# EAGLE board vocore-v1.0 (EAGLE 7.2.0), part 1 of 2
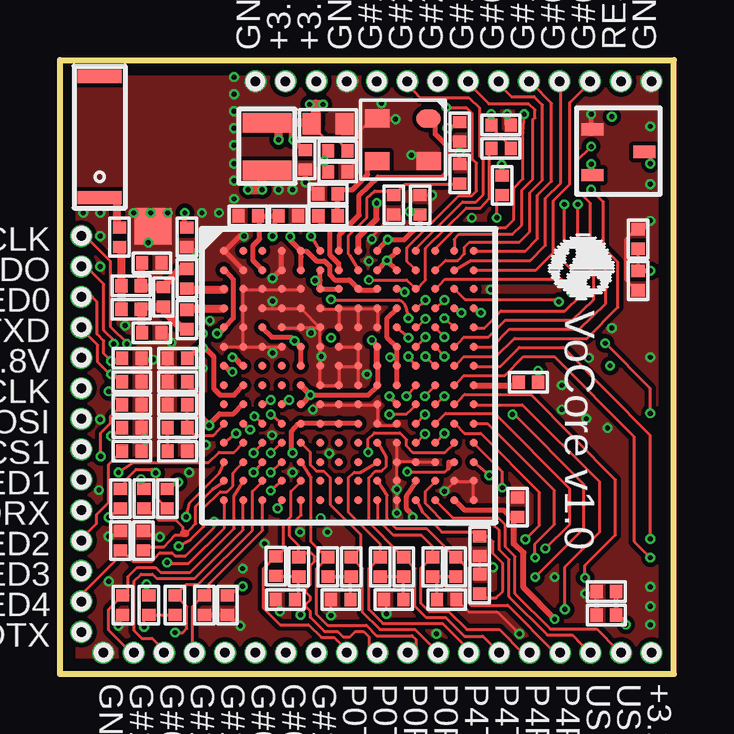
[diagram p0: board, top side]
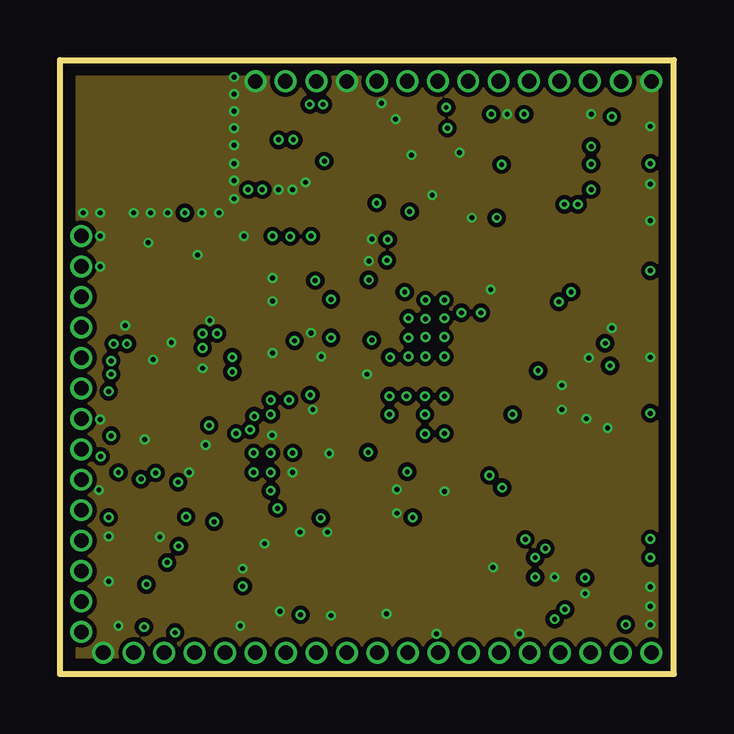
[diagram p1: board, inner layer Route2]
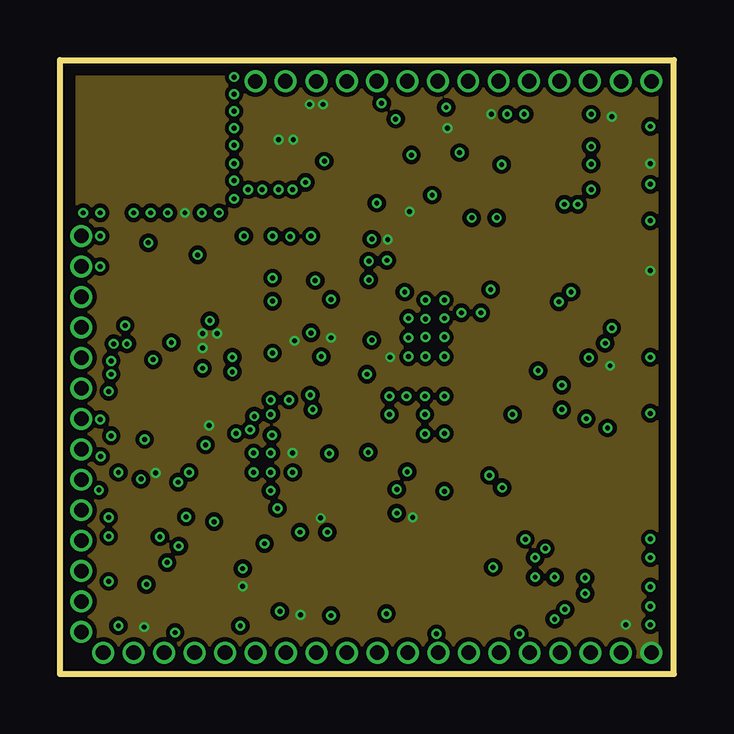
[diagram p2: board, inner layer Route3]
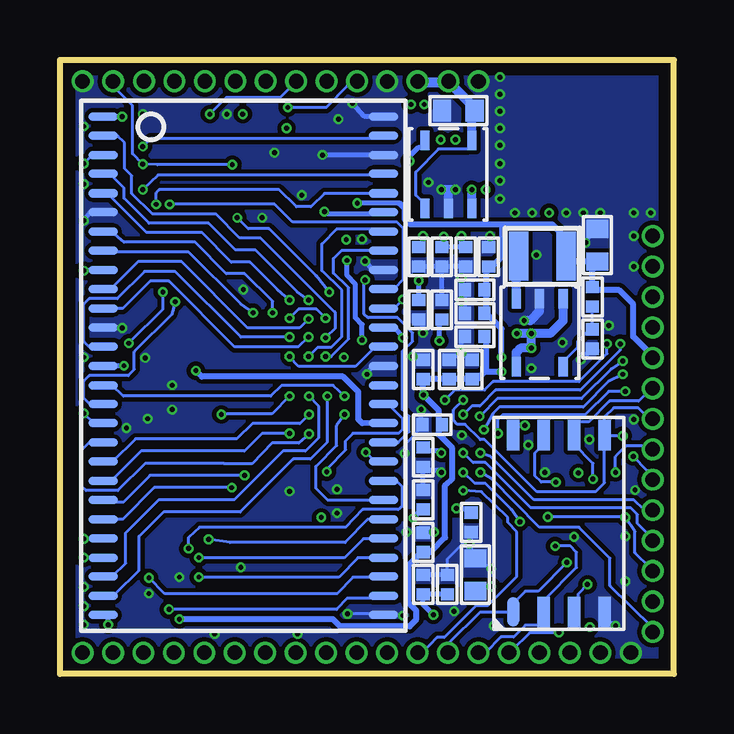
[diagram p3: board, bottom side, seen from below]

Size 25.6 x 25.6 mm. Coordinates in mm from the lower left corner, seen from the top.
Outline: 0,0 25.6,0 25.6,25.6 0,25.6 0,0
Copper layers ((1*2)*(3*16)): Top 0.0356mm / dielectric 1.5011mm / Route2 0.0356mm / dielectric 0.1499mm / Route3 0.0356mm / dielectric 0.2007mm / Bottom 0.0356mm
Design rules "SilverCircuits4layer *": minimum track width 7mil, minimum drill 14mil, track to track 7mil, track to pad 7mil, pad to pad 7mil, via to via 7mil, smd to smd 0mil, copper to edge 20mil, drill to drill 8mil, minimum pad ring 0mil, minimum via ring 2mil, stop-mask expansion 4mil, vias tented up to drill 0mil, thermal gap 10mil

## Footprints (pad centres in the part's own frame; a part is rotated, then mirrored left to right if it is on the bottom)
0402_1PRIMARY = smd 0.559 x 0.508: 1 0,0.406; 2 0,-0.406
0603_1PRIMARY = smd 0.762 x 0.914: 1 -0.686,0; 2 0.686,0
5020_1PRIMARY = smd 0.559 x 1.829: 1 -0.94,0.584; 2 4.115,0.584
0806_1PRIMARY = smd 0.813 x 2.032: 1 -0.991,-0.051; 2 0.991,-0.051
PORT_1PIN_DECAL_1PRIMARY = drill 0.61 pad 0.914: 1 -0.076,-1.27
TEST_POINT_GND_1PRIMARY = smd 1.524 x 1.524: 1 -0.076,-1.27
TFBGA196_1PRIMARY = smd 0.33 x 0.33: 1 -5.207,5.207; 2 -4.394,5.207; 3 -3.607,5.207; 4 -2.794,5.207; 5 -2.007,5.207; 6 -1.194,5.207; 7 -0.406,5.207; 8 0.406,5.207; 9 1.194,5.207; 10 2.007,5.207; 11 2.794,5.207; 12 3.607,5.207; 13 4.394,5.207; 14 5.207,5.207; 15 -5.207,4.394; 16 -4.394,4.394; 17 -3.607,4.394; 18 -2.794,4.394; 19 -2.007,4.394; 20 -1.194,4.394; 21 -0.406,4.394; 22 0.406,4.394; 23 1.194,4.394; 24 2.007,4.394; 25 2.794,4.394; 26 3.607,4.394; 27 4.394,4.394; 28 5.207,4.394; 29 -5.207,3.607; 30 -4.394,3.607; 31 -3.607,3.607; 32 -2.794,3.607; 33 -2.007,3.607; 34 -1.194,3.607; 35 -0.406,3.607; 36 0.406,3.607; 37 1.194,3.607; 38 2.007,3.607; 39 2.794,3.607; 40 3.607,3.607; 41 4.394,3.607; 42 5.207,3.607; 43 -5.207,2.794; 44 -4.394,2.794; 45 -3.607,2.794; 46 -2.794,2.794; 47 -2.007,2.794; 48 -1.194,2.794; 49 -0.406,2.794; 50 0.406,2.794; 51 1.194,2.794; 52 2.007,2.794; 53 2.794,2.794; 54 3.607,2.794; 55 4.394,2.794; 56 5.207,2.794; 57 -5.207,2.007; 58 -4.394,2.007; 59 -3.607,2.007; 60 -2.794,2.007; 61 -2.007,2.007; 62 -1.194,2.007; 63 -0.406,2.007; 64 0.406,2.007; 65 1.194,2.007; 66 2.007,2.007; 67 2.794,2.007; 68 3.607,2.007; 69 4.394,2.007; 70 5.207,2.007; 71 -5.207,1.194; 72 -4.394,1.194; 73 -3.607,1.194; 74 -2.794,1.194; 75 -2.007,1.194; 76 -1.194,1.194; 77 -0.406,1.194; 78 0.406,1.194; 79 1.194,1.194; 80 2.007,1.194; 81 2.794,1.194; 82 3.607,1.194; 83 4.394,1.194; 84 5.207,1.194; 85 -5.207,0.406; 86 -4.394,0.406; 87 -3.607,0.406; 88 -2.794,0.406; 89 -2.007,0.406; 90 -1.194,0.406; 91 -0.406,0.406; 92 0.406,0.406; 93 1.194,0.406; 94 2.007,0.406; 95 2.794,0.406; 96 3.607,0.406; 97 4.394,0.406; 98 5.207,0.406; 99 -5.207,-0.406; 100 -4.394,-0.406; 101 -3.607,-0.406; 102 -2.794,-0.406; 103 -2.007,-0.406; 104 -1.194,-0.406; 105 -0.406,-0.406; 106 0.406,-0.406; 107 1.194,-0.406; 108 2.007,-0.406; 109 2.794,-0.406; 110 3.607,-0.406; 111 4.394,-0.406; 112 5.207,-0.406; 113 -5.207,-1.194; 114 -4.394,-1.194; 115 -3.607,-1.194; 116 -2.794,-1.194; 117 -2.007,-1.194; 118 -1.194,-1.194; 119 -0.406,-1.194; 120 0.406,-1.194; 121 1.194,-1.194; 122 2.007,-1.194; 123 2.794,-1.194; 124 3.607,-1.194; 125 4.394,-1.194; 126 5.207,-1.194; 127 -5.207,-2.007; 128 -4.394,-2.007; 129 -3.607,-2.007; 130 -2.794,-2.007; 131 -2.007,-2.007; 132 -1.194,-2.007; 133 -0.406,-2.007; 134 0.406,-2.007; 135 1.194,-2.007; 136 2.007,-2.007; 137 2.794,-2.007; 138 3.607,-2.007; 139 4.394,-2.007; 140 5.207,-2.007; 141 -5.207,-2.794; 142 -4.394,-2.794; 143 -3.607,-2.794; 144 -2.794,-2.794; 145 -2.007,-2.794; 146 -1.194,-2.794; 147 -0.406,-2.794; 148 0.406,-2.794; 149 1.194,-2.794; 150 2.007,-2.794; 151 2.794,-2.794; 152 3.607,-2.794; 153 4.394,-2.794; 154 5.207,-2.794; 155 -5.207,-3.607; 156 -4.394,-3.607; 157 -3.607,-3.607; 158 -2.794,-3.607; 159 -2.007,-3.607; 160 -1.194,-3.607; 161 -0.406,-3.607; 162 0.406,-3.607; 163 1.194,-3.607; 164 2.007,-3.607; 165 2.794,-3.607; 166 3.607,-3.607; 167 4.394,-3.607; 168 5.207,-3.607; 169 -5.207,-4.394; 170 -4.394,-4.394; 171 -3.607,-4.394; 172 -2.794,-4.394; 173 -2.007,-4.394; 174 -1.194,-4.394; 175 -0.406,-4.394; 176 0.406,-4.394; 177 1.194,-4.394; 178 2.007,-4.394; 179 2.794,-4.394; 180 3.607,-4.394; 181 4.394,-4.394; 182 5.207,-4.394; 183 -5.207,-5.207; 184 -4.394,-5.207; 185 -3.607,-5.207; 186 -2.794,-5.207; 187 -2.007,-5.207; 188 -1.194,-5.207; 189 -0.406,-5.207; 190 0.406,-5.207; 191 1.194,-5.207; 192 2.007,-5.207; 193 2.794,-5.207; 194 3.607,-5.207; 195 4.394,-5.207; 196 5.207,-5.207
SO8_1PRIMARY = smd 1.245 x 0.508: 1 -3.683,1.905 | smd 1.27 x 0.508: 2 -3.683,0.635; 3 -3.683,-0.635; 4 -3.683,-1.905; 5 3.683,-1.905; 6 3.683,-0.635; 7 3.683,0.635; 8 3.683,1.905
LDO1_1PRIMARY = smd 0.381 x 0.813: 1 -1.956,-2.845; 2 -0.965,-2.845; 3 0,-2.845; 4 0,0; 5 -1.956,0
U4_1PRIMARY = smd 0.914 x 0.508: 1 0,0; 2 0,-1.905; 3 -2.159,-0.965
Y1_1PRIMARY = smd 0.762 x 1.016: 1 0,-0.203; 2 0,1.93; 3 -1.778,1.93; 4 -1.778,-0.203
TSOP2-54P-400MIL_1PRIMARY = smd 1.219 x 0.356: 1 -5.842,10.389; 2 -5.842,9.601; 3 -5.842,8.788; 4 -5.842,8.001; 5 -5.842,7.188; 6 -5.842,6.401; 7 -5.842,5.588; 8 -5.842,4.801; 9 -5.842,3.988; 10 -5.842,3.2; 11 -5.842,2.388; 12 -5.842,1.6; 13 -5.842,0.813; 14 -5.842,0; 15 -5.842,-0.813; 16 -5.842,-1.6; 17 -5.842,-2.388; 18 -5.842,-3.2; 19 -5.842,-3.988; 20 -5.842,-4.801; 21 -5.842,-5.588; 22 -5.842,-6.401; 23 -5.842,-7.188; 24 -5.842,-8.001; 25 -5.842,-8.788; 26 -5.842,-9.601; 27 -5.842,-10.389; 28 5.842,-10.389; 29 5.842,-9.601; 30 5.842,-8.788; 31 5.842,-8.001; 32 5.842,-7.188; 33 5.842,-6.401; 34 5.842,-5.588; 35 5.842,-4.801; 36 5.842,-3.988; 37 5.842,-3.2; 38 5.842,-2.388; 39 5.842,-1.6; 40 5.842,-0.813; 41 5.842,0; 42 5.842,0.813; 43 5.842,1.6; 44 5.842,2.388; 45 5.842,3.2; 46 5.842,3.988; 47 5.842,4.801; 48 5.842,5.588; 49 5.842,6.401; 50 5.842,7.188; 51 5.842,8.001; 52 5.842,8.788; 53 5.842,9.601; 54 5.842,10.389

## Placement (x,y rotation side)
C2  0402  [0402_1PRIMARY]  7.72,17.4 180 bottom
C4  0402  [0402_1PRIMARY]  7.85,19.1 270 top
C6  0402  [0402_1PRIMARY]  8.69,17.4 0 bottom
C7  0402  [0402_1PRIMARY]  9.53,19.1 90 top
C8  0402  [0402_1PRIMARY]  9.68,17.4 0 bottom
C9  0402  [0402_1PRIMARY]  18.39,22.89 90 top
C10  0402  [0402_1PRIMARY]  13.92,19.56 180 top
C14  0402  [0402_1PRIMARY]  10.64,15.19 180 bottom
C15  0402  [0402_1PRIMARY]  11.18,20.02 90 top
C16  0402  [0402_1PRIMARY]  10.46,12.7 180 bottom
C17  0402  [0402_1PRIMARY]  15.01,19.56 180 top
C18  0402  [0402_1PRIMARY]  10.64,17.4 180 bottom
C35  0402  [0402_1PRIMARY]  5.28,16.48 180 top
C36  0402  [0402_1PRIMARY]  2.97,16.18 270 top
C37  0402  [0402_1PRIMARY]  4.32,15.72 0 top
C38  0402  [0402_1PRIMARY]  5.28,14.78 0 top
C40  0402  [0402_1PRIMARY]  3.84,14.22 90 top
C42  0402  [0402_1PRIMARY]  9.68,15.19 180 bottom
C43  0402  [0402_1PRIMARY]  17.5,5.33 0 top
C48  0402  [0402_1PRIMARY]  11.71,3.1 270 top
C50  0402  [0402_1PRIMARY]  9.4,3.1 270 top
C77  0402  [0402_1PRIMARY]  13.92,3.1 270 top
C79  0402  [0402_1PRIMARY]  16.13,3.1 90 top
C84  0402  [0402_1PRIMARY]  16.66,22.61 0 top
C92  0402  [0402_1PRIMARY]  10.46,7.26 180 bottom
C93  0402  [0402_1PRIMARY]  8.41,12.7 180 bottom
C98  0402  [0402_1PRIMARY]  9.37,12.7 180 bottom
C103  0603  [0603_1PRIMARY]  8.99,23.5 180 bottom
C104  0402  [0402_1PRIMARY]  8.31,14.07 270 bottom
C105  0603  [0603_1PRIMARY]  8.28,4.14 270 bottom
C106  0603  [0603_1PRIMARY]  3.2,17.88 90 bottom
C107  0603  [0603_1PRIMARY]  11.18,22.94 0 top
C108  0402  [0402_1PRIMARY]  8.31,15.04 270 bottom
C109  0402  [0402_1PRIMARY]  10.46,5.49 180 bottom
C110  0402  [0402_1PRIMARY]  19.08,6.96 180 top
C111  0402  [0402_1PRIMARY]  10.08,10.39 270 bottom
C112  0402  [0402_1PRIMARY]  6.98,2.87 0 top
C113  0402  [0402_1PRIMARY]  4.9,13.16 270 top
C114  0402  [0402_1PRIMARY]  9.45,3.73 180 bottom
C161  0402  [0402_1PRIMARY]  8.31,16.03 270 bottom
C251  0402  [0402_1PRIMARY]  22.78,2.46 90 top
C279  0402  [0402_1PRIMARY]  2.49,18.21 180 top
C387  0402  [0402_1PRIMARY]  10.24,21.44 0 top
C388  0402  [0402_1PRIMARY]  22.78,3.43 270 top
C389  0402  [0402_1PRIMARY]  24.1,18.14 180 top
C390  0402  [0402_1PRIMARY]  24.1,16.41 0 top
C391  0402  [0402_1PRIMARY]  10.46,3.73 180 bottom
C414  0402  [0402_1PRIMARY]  4.9,12.19 270 top
C422  0402  [0402_1PRIMARY]  10.46,9.04 0 bottom
C443  0402  [0402_1PRIMARY]  5.28,18.21 180 top
CON2  5020  [5020_1PRIMARY]  1.07,23.98 270 top
D1  0402  [0402_1PRIMARY]  4.9,9.3 90 top
L11  0402  [0402_1PRIMARY]  3.84,17.14 90 top
L12  0402  [0402_1PRIMARY]  2.97,15.21 270 top
L14  0806  [0806_1PRIMARY]  5.49,17.48 0 bottom
L15  0806  [0806_1PRIMARY]  8.59,22 90 top
PB00  PORT_1PIN_DECAL  [PORT_1PIN_DECAL_1PRIMARY]  1.88,2.16 0 top
PB01  PORT_1PIN_DECAL  [PORT_1PIN_DECAL_1PRIMARY]  3.15,2.16 0 top
PB02  PORT_1PIN_DECAL  [PORT_1PIN_DECAL_1PRIMARY]  4.42,2.16 0 top
PB03  PORT_1PIN_DECAL  [PORT_1PIN_DECAL_1PRIMARY]  6.96,2.16 0 top
PB04  PORT_1PIN_DECAL  [PORT_1PIN_DECAL_1PRIMARY]  5.69,2.16 0 top
PB05  PORT_1PIN_DECAL  [PORT_1PIN_DECAL_1PRIMARY]  8.23,2.16 0 top
PB06  PORT_1PIN_DECAL  [PORT_1PIN_DECAL_1PRIMARY]  9.5,2.16 0 top
PB07  PORT_1PIN_DECAL  [PORT_1PIN_DECAL_1PRIMARY]  10.77,2.16 0 top
PB08  PORT_1PIN_DECAL  [PORT_1PIN_DECAL_1PRIMARY]  12.04,2.16 0 top
PB09  PORT_1PIN_DECAL  [PORT_1PIN_DECAL_1PRIMARY]  13.31,2.16 0 top
PB10  PORT_1PIN_DECAL  [PORT_1PIN_DECAL_1PRIMARY]  14.58,2.16 0 top
PB11  PORT_1PIN_DECAL  [PORT_1PIN_DECAL_1PRIMARY]  15.85,2.16 0 top
PB12  PORT_1PIN_DECAL  [PORT_1PIN_DECAL_1PRIMARY]  17.12,2.16 0 top
PB13  PORT_1PIN_DECAL  [PORT_1PIN_DECAL_1PRIMARY]  18.39,2.16 0 top
PB14  PORT_1PIN_DECAL  [PORT_1PIN_DECAL_1PRIMARY]  19.66,2.16 0 top
PB15  PORT_1PIN_DECAL  [PORT_1PIN_DECAL_1PRIMARY]  20.93,2.16 0 top
PB16  PORT_1PIN_DECAL  [PORT_1PIN_DECAL_1PRIMARY]  22.2,2.16 0 top
PB17  PORT_1PIN_DECAL  [PORT_1PIN_DECAL_1PRIMARY]  23.47,2.16 0 top
PB18  PORT_1PIN_DECAL  [PORT_1PIN_DECAL_1PRIMARY]  24.74,2.16 0 top
PL01  PORT_1PIN_DECAL  [PORT_1PIN_DECAL_1PRIMARY]  0.97,19.53 0 top
PL02  PORT_1PIN_DECAL  [PORT_1PIN_DECAL_1PRIMARY]  0.97,18.26 0 top
PL03  PORT_1PIN_DECAL  [PORT_1PIN_DECAL_1PRIMARY]  0.97,16.99 0 top
PL04  PORT_1PIN_DECAL  [PORT_1PIN_DECAL_1PRIMARY]  0.97,15.72 0 top
PL05  PORT_1PIN_DECAL  [PORT_1PIN_DECAL_1PRIMARY]  0.97,14.45 0 top
PL06  PORT_1PIN_DECAL  [PORT_1PIN_DECAL_1PRIMARY]  0.97,13.18 0 top
PL07  PORT_1PIN_DECAL  [PORT_1PIN_DECAL_1PRIMARY]  0.97,11.91 0 top
PL08  PORT_1PIN_DECAL  [PORT_1PIN_DECAL_1PRIMARY]  0.97,10.64 0 top
PL09  PORT_1PIN_DECAL  [PORT_1PIN_DECAL_1PRIMARY]  0.97,9.37 0 top
PL10  PORT_1PIN_DECAL  [PORT_1PIN_DECAL_1PRIMARY]  0.97,8.1 0 top
PL11  PORT_1PIN_DECAL  [PORT_1PIN_DECAL_1PRIMARY]  0.97,6.83 0 top
PL12  PORT_1PIN_DECAL  [PORT_1PIN_DECAL_1PRIMARY]  0.97,5.56 0 top
PL13  PORT_1PIN_DECAL  [PORT_1PIN_DECAL_1PRIMARY]  0.97,4.29 0 top
PL14  PORT_1PIN_DECAL  [PORT_1PIN_DECAL_1PRIMARY]  0.97,3.02 0 top
PT01  PORT_1PIN_DECAL  [PORT_1PIN_DECAL_1PRIMARY]  8.23,25.98 0 top
PT02  PORT_1PIN_DECAL  [PORT_1PIN_DECAL_1PRIMARY]  10.77,25.98 0 top
PT03  PORT_1PIN_DECAL  [PORT_1PIN_DECAL_1PRIMARY]  9.5,25.98 359 top
PT04  PORT_1PIN_DECAL  [PORT_1PIN_DECAL_1PRIMARY]  12.04,25.98 0 top
PT05  PORT_1PIN_DECAL  [PORT_1PIN_DECAL_1PRIMARY]  13.31,25.98 359 top
PT06  PORT_1PIN_DECAL  [PORT_1PIN_DECAL_1PRIMARY]  14.58,25.98 359 top
PT07  PORT_1PIN_DECAL  [PORT_1PIN_DECAL_1PRIMARY]  15.85,25.98 359 top
PT08  PORT_1PIN_DECAL  [PORT_1PIN_DECAL_1PRIMARY]  17.12,25.98 359 top
PT09  PORT_1PIN_DECAL  [PORT_1PIN_DECAL_1PRIMARY]  18.39,25.98 359 top
PT10  PORT_1PIN_DECAL  [PORT_1PIN_DECAL_1PRIMARY]  19.66,25.98 359 top
PT11  PORT_1PIN_DECAL  [PORT_1PIN_DECAL_1PRIMARY]  20.93,25.98 359 top
PT12  PORT_1PIN_DECAL  [PORT_1PIN_DECAL_1PRIMARY]  22.2,25.98 359 top
PT13  PORT_1PIN_DECAL  [PORT_1PIN_DECAL_1PRIMARY]  23.47,25.98 0 top
PT14  PORT_1PIN_DECAL  [PORT_1PIN_DECAL_1PRIMARY]  24.74,25.98 0 top
R1  0402  [0402_1PRIMARY]  16.66,20.85 180 top
R8  0402  [0402_1PRIMARY]  17.5,3.76 0 top
R26  0402  [0402_1PRIMARY]  12.14,4.47 0 top
R27  0402  [0402_1PRIMARY]  8.99,4.5 0 top
R28  0402  [0402_1PRIMARY]  11.18,4.47 0 top
R29  0402  [0402_1PRIMARY]  9.96,4.47 0 top
R50  0402  [0402_1PRIMARY]  8.46,6.32 180 bottom
R55  0402  [0402_1PRIMARY]  13.36,4.47 0 top
R56  0402  [0402_1PRIMARY]  16.51,4.47 0 top
R57  0402  [0402_1PRIMARY]  14.33,4.47 0 top
R58  0402  [0402_1PRIMARY]  15.54,4.47 0 top
R67  0402  [0402_1PRIMARY]  3.4,13.97 0 bottom
R68  0402  [0402_1PRIMARY]  3.4,15.72 0 bottom
R69  0402  [0402_1PRIMARY]  11.58,21.82 270 top
R70  0402  [0402_1PRIMARY]  11.58,20.93 90 top
R71  0402  [0402_1PRIMARY]  4.47,7.32 180 top
R94  0402  [0402_1PRIMARY]  3.48,5.56 180 top
R95  0402  [0402_1PRIMARY]  3,10.26 90 top
R107  0402  [0402_1PRIMARY]  2.62,2.87 0 top
R118  0402  [0402_1PRIMARY]  2.51,5.56 0 top
R119  0402  [0402_1PRIMARY]  3,12.19 90 top
R142  0402  [0402_1PRIMARY]  4.9,11.23 90 top
R144  0402  [0402_1PRIMARY]  2.51,7.32 0 top
R150  0402  [0402_1PRIMARY]  3,9.3 270 top
R154  0402  [0402_1PRIMARY]  3,11.23 90 top
R189  0402  [0402_1PRIMARY]  18.44,20.37 180 top
R192  0402  [0402_1PRIMARY]  4.8,2.87 0 top
R193  0402  [0402_1PRIMARY]  4.9,10.26 90 top
R212  0402  [0402_1PRIMARY]  11.18,19.1 270 top
R293  0402  [0402_1PRIMARY]  18.39,21.92 270 top
R300  0402  [0402_1PRIMARY]  19.53,12.17 90 top
R308  0402  [0402_1PRIMARY]  3,13.16 90 top
R318  0402  [0402_1PRIMARY]  6.02,2.87 0 top
SR1  0402  [0402_1PRIMARY]  3.51,7.32 180 top
SR2  0402  [0402_1PRIMARY]  3.71,2.87 180 top
TEST1  TEST_POINT_GND  [TEST_POINT_GND_1PRIMARY]  3.96,19.94 0 top
U1  TFBGA196  [TFBGA196_1PRIMARY]  12.04,12.45 0 top
U3  SO8  [SO8_1PRIMARY]  4.8,6.27 90 bottom
U8  LDO1  [LDO1_1PRIMARY]  6.58,12.8 180 bottom
U9  LDO1  [LDO1_1PRIMARY]  8.43,22.25 0 bottom
U25  U4  [U4_1PRIMARY]  22.2,20.8 180 top
U33  Y1  [Y1_1PRIMARY]  15.16,23.16 90 top
U35  TSOP2-54P-400MIL  [TSOP2-54P-400MIL_1PRIMARY]  17.96,12.85 0 bottom

## Library data of the parts
C2 C4 C6-C10 C14-C18 C35-C38 C40 C42 C43 C48 C50 C77 C79 C84 C92 C93 C98 C103-C114 C161 C251 C279 C387-C391 C414 C422 C443 D1 L11 L12 L14 PB00 PB01-PB09 PB10-PB18 PL01-PL09 PL10-PL14 PT01-PT09 PT10-PT14 R1 R8 R26-R29 R50 R55-R58 R67-R71 R94 R95 R107 R118 R119 R142 R144 R150 R154 R189 R192 R193 R212 R293 R300 R308 R318 SR1 SR2 TEST1 U3 U8 U9 U33 U35 = VoCore.v1.0
CON2 L15 U1 U25 = vocore-v1.0

## Nets
1V8_FB: R67.1 R68.2 U8.5
1V8_SW: L14.1 U8.3
3V3_FB: R69.2 R70.1 U9.5
3V3_SW: L15.1 U9.3
$$$22498: U1.7 U33.1
$$$22629: C15.2 R212.1 U33.3
+1.2V: C16.1 C93.1 C98.1 C104.1 C109.1 C110.1 C111.1 U1.10 U1.23 U1.24 U1.79 U1.85 U1.93 U1.103 U1.107 U1.117 U1.195
+1.8V: C2.1 C106.1 C108.1 C161.1 L14.2 PL05.1 R68.1 U1.8 U1.86
+3.3V: C9.1 C17.1 C42.1 C84.1 C92.1 C105.2 C107.1 C112.1 C113.1 C114.1 C251.2 C387.1 C388.1 C389.1 C390.1 C391.1 C414.1 C422.1 C443.2 L15.2 PB18.1 R69.1 R71.1 R144.1 R192.2 R293.1 SR2.1 U1.9 U1.15 U1.52 U1.57 U1.59 U1.75 U1.80 U1.89 U1.94 U1.100 U1.108 U1.114 U1.131 U1.132 U1.133 U1.134 U1.179 U3.8 U8.1 U8.4 U25.3 U35.1 U35.3 U35.9 U35.14 U35.27 U35.43 U35.49
+5V: C103.1 PT02.1 PT03.1 U9.1 U9.4
EPHY0R_RC: C48.1 R26.2 R28.2
EPHY0T_RC: C50.1 R27.2 R29.2
EPHY4R_RC: C79.1 R56.2 R58.2
EPHY4T_RC: C77.1 R55.2 R57.2
EPHY_RES: R50.2 U1.186
GND: C2.2 C4.2 C6.2 C7.2 C8.2 C9.2 C10.1 C14.1 C15.1 C16.2 C17.2 C18.1 C40.2 C42.2 C43.2 C48.2 C50.2 C77.2 C79.2 C84.2 C92.2 C93.2 C98.2 C103.2 C104.2 C105.1 C106.2 C107.2 C108.2 C109.2 C110.2 C111.2 C112.2 C113.2 C114.2 C161.2 C251.1 C387.2 C388.2 C389.2 C390.2 C391.2 C414.2 C422.2 C443.1 D1.2 L11.2 PB00.1 PT01.1 PT04.1 PT14.1 R1.2 R8.1 R50.1 R67.2 R70.2 R94.2 R95.2 R107.2 R118.1 R119.2 R142.1 R150.1 R154.2 R308.2 R318.2 TEST1.1 U1.1 U1.4 U1.16 U1.18 U1.30 U1.31 U1.32 U1.33 U1.44 U1.45 U1.46 U1.47 U1.48 U1.49 U1.50 U1.51 U1.58 U1.60 U1.61 U1.62 U1.63 U1.64 U1.65 U1.71 U1.72 U1.73 U1.74 U1.76 U1.77 U1.78 U1.90 U1.91 U1.92 U1.104 U1.105 U1.106 U1.118 U1.119 U1.120 U1.121 U1.135 U1.136 U1.150 U1.164 U1.165 U1.166 U1.178 U1.181 U1.182 U1.192 U1.196 U3.4 U8.2 U9.2 U25.2 U33.2 U33.4 U35.6 U35.12 U35.28 U35.41 U35.46 U35.52 U35.54
GPIO0: PT09.1 U1.26
I2C_CLK: PT12.1 U1.28
I2C_SD: PT11.1 U1.27
JTAG_CLK: PT07.1 U1.12
JTAG_RST: PT06.1 U1.11
JTAG_TDI: PT10.1 U1.14
JTAG_TDO: PT05.1 U1.25
JTAG_TMS: PT08.1 U1.13
LED0: PL03.1 R308.1 U1.129
LED1: PL09.1 R154.1 U1.141
LED2: PL11.1 R150.2 U1.144
LED3: PL12.1 R144.2 U1.155
LED4: PL13.1 R118.2 U1.158
LED_WLAN: R142.2 R193.2 U1.127
LED_WLAN+: D1.1 R193.1
P0RN: PB11.1 R26.1 U1.145
P0RP: PB10.1 R28.1 U1.159
P0TN: PB08.1 R27.1 U1.173
P0TP: PB09.1 R29.1 U1.187
P4RN: PB15.1 R56.1 U1.177
P4RP: PB14.1 R58.1 U1.191
P4TN: PB12.1 R55.1 U1.163
P4TP: PB13.1 R57.1 U1.149
RESET: PT13.1 R189.2 U25.1
RESET_PORST: R189.1 U1.38
SDRAM_A0: U1.98 U35.23
SDRAM_A1: U1.111 U35.24
SDRAM_A2: U1.110 U35.25
SDRAM_A3: U1.109 U35.26
SDRAM_A4: U1.126 U35.29
SDRAM_A5: U1.125 U35.30
SDRAM_A6: U1.124 U35.31
SDRAM_A7: U1.140 U35.32
SDRAM_A8: U1.139 U35.33
SDRAM_A9: U1.123 U35.34
SDRAM_A10: U1.154 U35.22
SDRAM_A11: U1.138 U35.35
SDRAM_A12: U1.153 U35.36
SDRAM_BA0: U1.152 U35.20
SDRAM_BA1: U1.168 U35.21
SDRAM_CAS: U1.40 U35.17
SDRAM_CKE: R293.2 U1.39 U35.37
SDRAM_CLK: R300.2 U35.38
SDRAM_CS: U1.137 U35.19
SDRAM_D0: U1.66 U35.2
SDRAM_D1: U1.53 U35.4
SDRAM_D2: U1.54 U35.5
SDRAM_D3: U1.55 U35.7
SDRAM_D4: U1.56 U35.8
SDRAM_D5: U1.67 U35.10
SDRAM_D6: U1.81 U35.11
SDRAM_D7: U1.68 U35.13
SDRAM_D8: U1.82 U35.42
SDRAM_D9: U1.69 U35.44
SDRAM_D10: U1.70 U35.45
SDRAM_D11: U1.95 U35.47
SDRAM_D12: U1.96 U35.48
SDRAM_D13: U1.83 U35.50
SDRAM_D14: U1.97 U35.51
SDRAM_D15: U1.84 U35.53
SDRAM_DQML: U1.122 U35.15
SDRAM_DQMU: U1.167 U35.39
SDRAM_R51: R300.1 U1.112
SDRAM_RAS: U1.151 U35.18
SDRAM_WE: U1.41 U35.16
SPI_CLK: PL06.1 SR1.2 U3.6
SPI_CLK_L: R94.1 SR1.1 U1.169
SPI_CS0: PB06.1 U1.183 U3.1
SPI_CS1: PL08.1 U1.142
SPI_HOLD: R71.2 U3.7
SPI_MISO: PB05.1 U1.156 U3.2
SPI_MOSI: PL07.1 R95.1 U1.115 U3.5
SPI_WE: SR2.2 U3.3
UARTF_CTS: PL02.1 U1.130
UARTF_DCD: PL01.1 U1.116
UARTF_DSR: PL10.1 U1.143
UARTF_DTR: PB07.1 U1.172
UARTF_RIN: PL14.1 U1.157
UARTF_RTS: PB02.1 U1.184
UARTF_RXD: PB03.1 R192.1 U1.171
UARTF_TXD: PL04.1 R119.1 U1.128
UARTL_RXD2: PB04.1 R318.1 U1.185
UARTL_TXD2: PB01.1 R107.1 U1.170
UPHY_RES: C43.1 R8.2 U1.193
USB_M: PB16.1 U1.180
USB_P: PB17.1 U1.194
WL_ANT: C36.2 C279.1 L12.2
WL_ANT_C: C279.2 CON2.2
WL_RF0_OUTL: C35.2 C36.1 C37.1 L11.1
WL_RF0_OUTN: C38.1 U1.43
WL_RF0_OUTP: C35.1 U1.29
WL_RF0_OUTR: C37.2 C38.2 C40.1 L12.1
WL_V12_CAP: C4.1 C6.1 C7.1 C8.1 U1.5 U1.17 U1.19 U1.36 U1.37
WL_V12_PLL: C14.2 U1.20 U1.34 U1.35
WL_V12_RES: C10.2 R1.1 U1.22
WL_V33: C18.2 U1.6
WL_X2: R212.2 U1.21